# EAGLE board copro - Copy (EAGLE 8.4.1)
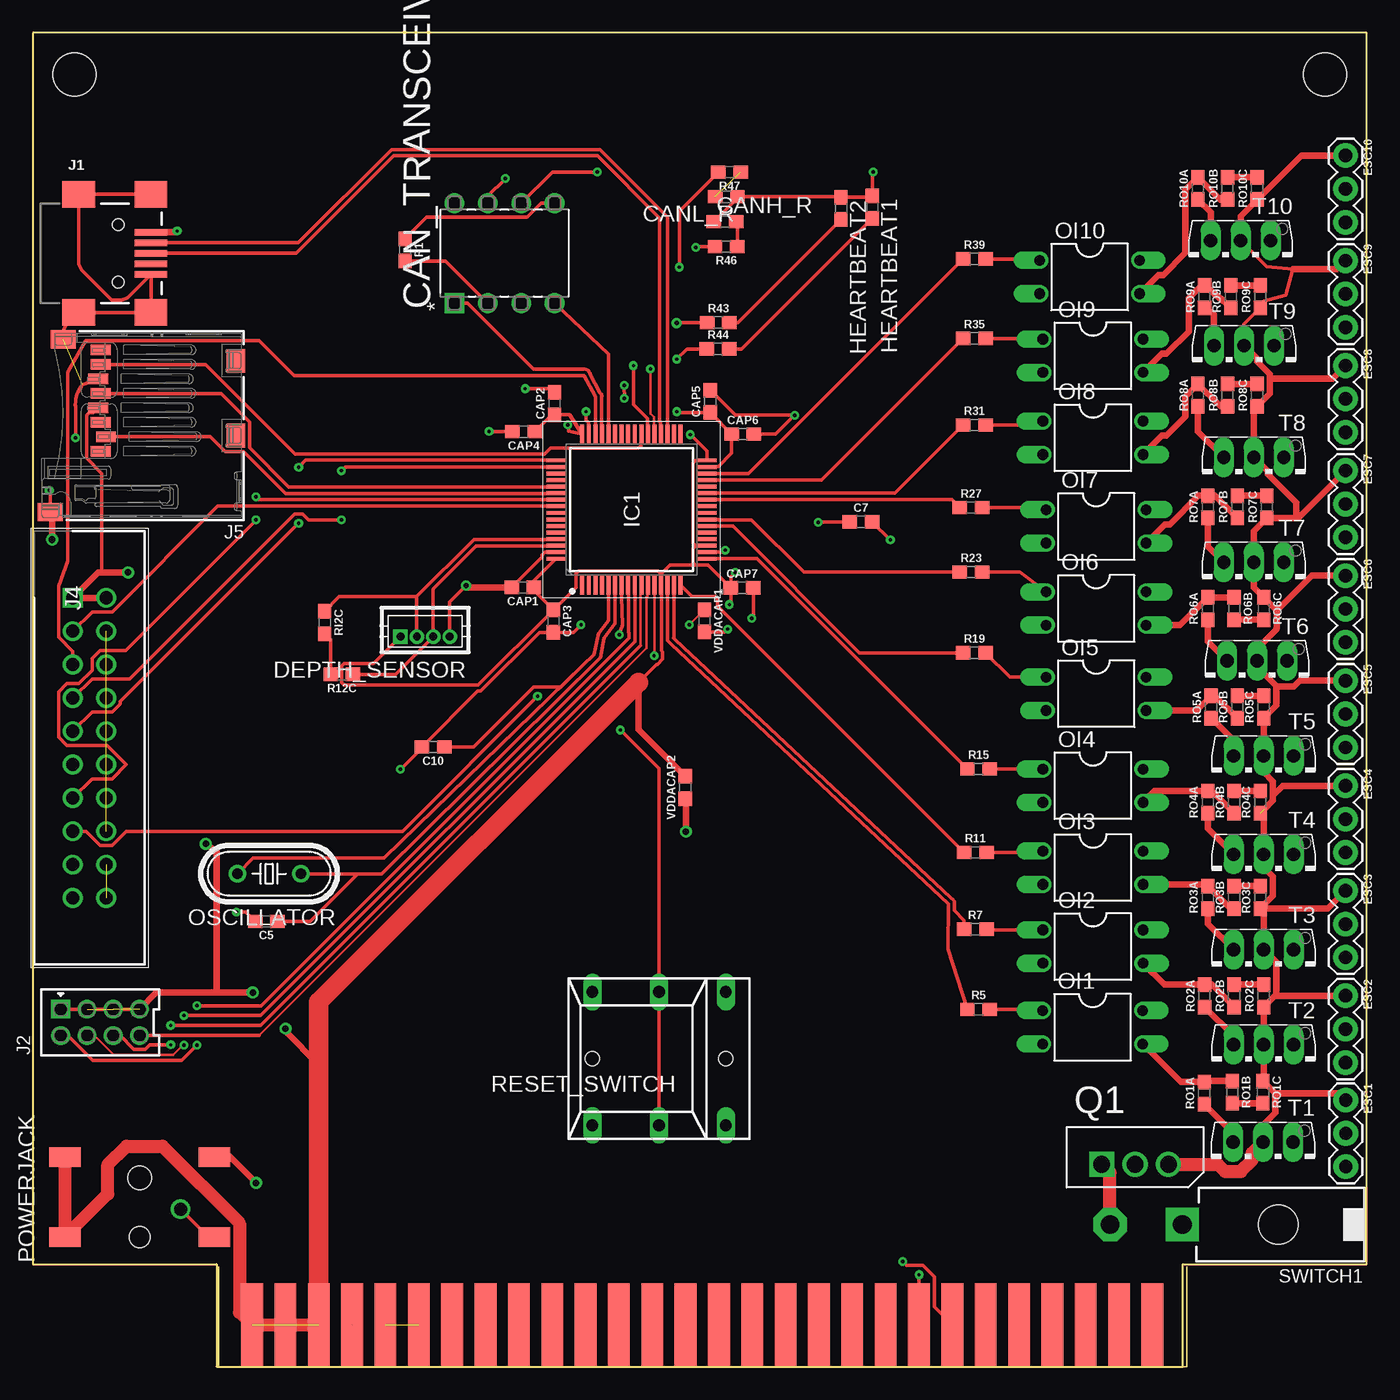
[diagram p0: board, top side]
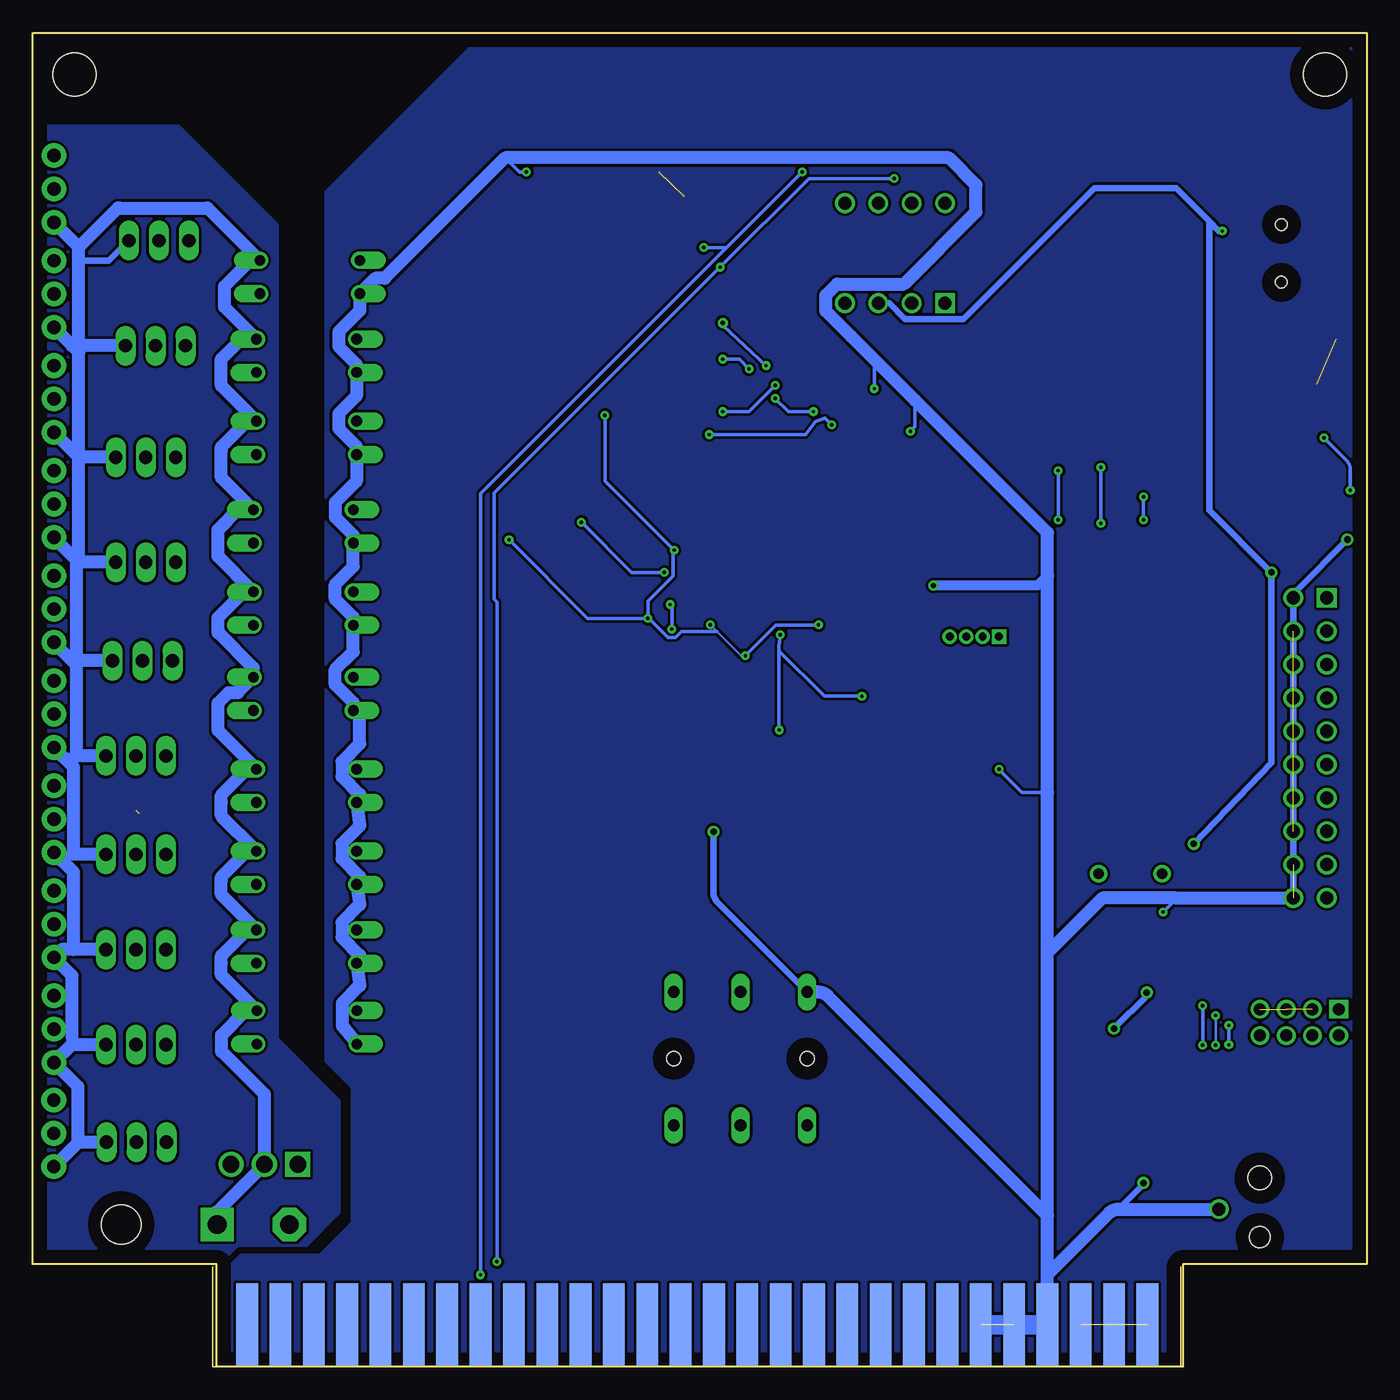
[diagram p1: board, bottom side, seen from below]

Size 101.6 x 101.6 mm. Coordinates in mm from the lower left corner, seen from the top.
Outline: 14,0 87.6,0 87.6,7.8 101.6,7.8 101.6,101.6 0,101.6 0,7.8 14,7.8 14,0
Copper layers (1*16): Top 0.035mm / dielectric 1.5mm / Bottom 0.035mm
Design rules "battery_balancer": minimum track width 6mil, minimum drill 0.35mm, track to track 0.205mm, track to pad 0.205mm, pad to pad 0.205mm, via to via 0.205mm, smd to smd 6mil, copper to edge 40mil, drill to drill 6mil, minimum pad ring 10mil, minimum via ring 8mil, stop-mask expansion 4mil, vias tented up to drill 0mil, thermal gap 10mil
Holes 3.26 mm at 3.17,98.42 98.42,98.42

## Footprints (pad centres in the part's own frame; a part is rotated, then mirrored left to right if it is on the bottom)
0603 = smd 1.1 x 1: 1 -0.85,0; 2 0.85,0
DIP254P762X432-8 = drill 0.991 square: 1 -7.62,7.62 | drill 0.991: 2 -7.62,5.08; 3 -7.62,2.54; 4 -7.62,0; 5 0,0; 6 0,2.54; 7 0,5.08; 8 0,7.62
DF13-4P-1.25DSA = drill 0.6 pad 1.016 square: P$1 1.875,0 | drill 0.6 pad 1.016: P$2 0.625,0; P$3 -0.625,0; P$4 -1.875,0
1X03 = drill 1.016 pad 1.88: 1 0,0; 2 2.54,0; 3 5.08,0
QFP50P1200X1200X160-64N = smd 1.45 x 0.3: 1 -5.75,3.75; 2 -5.75,3.25; 3 -5.75,2.75; 4 -5.75,2.25; 5 -5.75,1.75; 6 -5.75,1.25; 7 -5.75,0.75; 8 -5.75,0.25; 9 -5.75,-0.25; 10 -5.75,-0.75; 11 -5.75,-1.25; 12 -5.75,-1.75; 13 -5.75,-2.25; 14 -5.75,-2.75; 15 -5.75,-3.25; 16 -5.75,-3.75; 33 5.75,-3.75; 34 5.75,-3.25; 35 5.75,-2.75; 36 5.75,-2.25; 37 5.75,-1.75; 38 5.75,-1.25; 39 5.75,-0.75; 40 5.75,-0.25; 41 5.75,0.25; 42 5.75,0.75; 43 5.75,1.25; 44 5.75,1.75; 45 5.75,2.25; 46 5.75,2.75; 47 5.75,3.25; 48 5.75,3.75 | smd 0.3 x 1.45: 17 -3.75,-5.75; 18 -3.25,-5.75; 19 -2.75,-5.75; 20 -2.25,-5.75; 21 -1.75,-5.75; 22 -1.25,-5.75; 23 -0.75,-5.75; 24 -0.25,-5.75; 25 0.25,-5.75; 26 0.75,-5.75; 27 1.25,-5.75; 28 1.75,-5.75; 29 2.25,-5.75; 30 2.75,-5.75; 31 3.25,-5.75; 32 3.75,-5.75; 49 3.75,5.75; 50 3.25,5.75; 51 2.75,5.75; 52 2.25,5.75; 53 1.75,5.75; 54 1.25,5.75; 55 0.75,5.75; 56 0.25,5.75; 57 -0.25,5.75; 58 -0.75,5.75; 59 -1.25,5.75; 60 -1.75,5.75; 61 -2.25,5.75; 62 -2.75,5.75; 63 -3.25,5.75; 64 -3.75,5.75
USB-MINIB = smd 2.5 x 0.5: D+ 2.5,0; D- 2.5,0.8; GND 2.5,-1.6; ID 2.5,-0.8; VBUS 2.5,1.6 | smd 2.5 x 2: S1 -3,4.5; S2 2.5,4.5; S3 -3,-4.5; S4 2.5,-4.5 | hole 0.9: 0,2.2; 0,-2.2
79107-08 = drill 0.914 square: 1 -3,1 | drill 0.914: 2 -3,-1; 3 -1,1; 4 -1,-1; 5 1,1; 6 1,-1; 7 3,1; 8 3,-1
SHDR20W81P254_2X10_3300X840X93 = drill 1 pad 1.5 square: 1 0,0 | drill 1 pad 1.5: 2 0,2.54; 3 2.54,0; 4 2.54,2.54; 5 5.08,0; 6 5.08,2.54; 7 7.62,0; 8 7.62,2.54; 9 10.16,0; 10 10.16,2.54; 11 12.7,0; 12 12.7,2.54; 13 15.24,0; 14 15.24,2.54; 15 17.78,0; 16 17.78,2.54; 17 20.32,0; 18 20.32,2.54; 19 22.86,0; 20 22.86,2.54
5008730806 = smd 0.8 x 1.5: 1 -1.94,10.7; 2 -0.84,10.3; 3 0.26,10.7; 4 1.36,10.9; 5 2.46,10.7; 6 3.56,10.9; 7 4.66,10.7; 8 5.76,10.7 | smd 1.8 x 1.4: CD1 -0.75,0.4; CD2 4.95,0.4 | smd 1.4 x 1.9: S3 -6.575,14.55; S4 6.575,13.55
DIL04 = drill 0.813 offset: 1 -1.27,-3.81; 2 1.27,-3.81; 3 1.27,3.81; 4 -1.27,3.81
HC49/S = drill 0.813: 1 -2.413,0; 2 2.413,0
CUI_PJ-002AH-SMT-TR = smd 1.5 x 2.4: 1.1 -3.05,5.7; 1.2 3.05,5.7; 2 -3.05,-5.7; 3 3.05,-5.7 | hole 1.6: -3.05,0 | hole 1.8: 1.45,0
TO254P450X1020X1935-3P = drill 1.27 square: 1 -5.08,-1.092 | drill 1.27: 2 -2.54,-1.092; 3 0,-1.092
REKN = drill 0.9 long: 0A 5.08,5.08; 0B 5.08,-5.08; 1A 0,5.08; 1B 0,-5.08; A -5.08,5.08; B -5.08,-5.08 | hole 1.1: -5.08,0; 5.08,0
39-30-?02? = drill 1.422 pad 2.54 square: 1 0,0 | drill 1.422 pad 2.54 octagon: 2 0,5.512 | hole 3: 0,-7.3
TO126V = drill 1.016 long: 1 -2.286,-1.27; 2 0,-1.27; 3 2.286,-1.27
5530843-6-BOARDFINGERS = smd 1.651 x 6.35 bottom: 3.3V_4 0.826,3.175; 3.3V_5 3.365,3.175; 3.3V_6 5.905,3.175; EXTRA1 16.066,3.175; EXTRA2 18.605,3.175; EXTRA3 21.145,3.175; EXTRA4 23.686,3.175; EXTRA5 26.226,3.175; EXTRA6 28.765,3.175; EXTRA7 31.305,3.175; EXTRA8 33.846,3.175; EXTRA9 36.386,3.175; EXTRA10 38.925,3.175; EXTRA11 41.465,3.175; EXTRA12 44.005,3.175; EXTRA13 46.545,3.175; EXTRA14 49.086,3.175; EXTRA15 51.626,3.175; EXTRA16 54.166,3.175; EXTRA17 56.706,3.175; EXTRA18 59.245,3.175; EXTRA19 61.785,3.175; EXTRA20 64.326,3.175; EXTRA21 66.865,3.175; EXTRA22 69.406,3.175; GND_4 8.445,3.175; GND_5 10.986,3.175; GND_6 13.525,3.175 | smd 1.651 x 6.35: 3.3VP1 0.826,3.175; 3.3VP2 3.365,3.175; 3.3VP3 5.905,3.175; CAN_H 51.626,3.175; CAN_L 54.166,3.175; EXTRA23 16.066,3.175; EXTRA24 18.605,3.175; EXTRA25 21.145,3.175; EXTRA26 23.686,3.175; EXTRA27 26.226,3.175; EXTRA28 28.765,3.175; EXTRA29 31.305,3.175; EXTRA30 33.846,3.175; EXTRA31 36.386,3.175; EXTRA32 38.925,3.175; EXTRA33 41.465,3.175; EXTRA34 44.005,3.175; EXTRA35 46.545,3.175; GND1 8.445,3.175; GND2 10.986,3.175; GND3 13.525,3.175; KILL_SWITCH 49.086,3.175; SCL_DEPTH 59.245,3.175; SCL_ESC 69.406,3.175; SCL_SENSOR 64.326,3.175; SDA_DEPTH 56.706,3.175; SDA_ESC 66.865,3.175; SDA_SENSOR 61.785,3.175

## Placement (x,y rotation side)
C5  1nF  [0603]  17.79,33.92 180 top
C7  .1 uF  [0603]  63.08,64.35 0 top
C10  1nF  [0603]  30.49,47.2 180 top
CAN_TRANSCEIVER  MCP2551-I/P  [DIP254P762X432-8]  39.74,88.62 90 top
CANH_R  LTST-S270GKT  [0603]  52.73,87.21 0 top
CANL_R  LTST-S270GKT  [0603]  52.83,89.11 180 top
CAP1  100nF  [0603]  37.33,59.36 180 top
CAP2  100nF  [0603]  39.74,73.36 90 top
CAP3  100nF  [0603]  39.65,56.79 270 top
CAP4  100nF  [0603]  37.39,71.21 180 top
CAP5  2.2uF  [0603]  51.6,73.53 90 top
CAP6  2.2uF  [0603]  54.08,71.03 0 top
CAP7  4.7uF  [0603]  54.02,59.33 0 top
DEPTH_SENSOR  DF13-4P-1.25DSA  [DF13-4P-1.25DSA]  29.88,55.61 180 top
ESC1  [1X03]  100.01,20.31 270 top
ESC2  [1X03]  100,28.25 270 top
ESC3  [1X03]  100,36.25 270 top
ESC4  [1X03]  100,44.25 270 top
ESC5  [1X03]  100,52.25 270 top
ESC6  [1X03]  100,60.25 270 top
ESC7  [1X03]  100,68.25 270 top
ESC8  [1X03]  100,76.25 270 top
ESC9  [1X03]  100,84.25 270 top
ESC10  [1X03]  100,92.25 270 top
HEARTBEAT1  LTST-S270GKT  [0603]  63.94,88.33 270 top
HEARTBEAT2  LTST-S270GKT  [0603]  61.56,88.22 270 top
IC1  STM32F405RGT6  [QFP50P1200X1200X160-64N]  45.6,65.29 90 top
J1  USB_MINI-B_SMT  [USB-MINIB]  6.5,84.8 0 top
J2  79107-08  [79107-08]  5.12,26.23 0 top
J4  30320-6002HB  [SHDR20W81P254_2X10_3300X840X93]  3.05,58.56 270 top
J5  5008730806  [5008730806]  15.88,71.67 90 top
OI1  SFH610  [DIL04]  80.72,25.85 270 top
OI2  SFH610  [DIL04]  80.75,32 270 top
OI3  SFH610  [DIL04]  80.75,38 270 top
OI4  SFH610  [DIL04]  80.75,44.25 270 top
OI5  SFH610  [DIL04]  81,51.25 270 top
OI6  SFH610  [DIL04]  81,57.75 270 top
OI7  SFH610  [DIL04]  81,64 270 top
OI8  SFH610  [DIL04]  80.75,70.75 270 top
OI9  SFH610  [DIL04]  80.75,77 270 top
OI10  SFH610  [DIL04]  80.5,83 270 top
OSCILLATOR  [HC49/S]  18,37.55 180 top
POWERJACK  PJ-002AH-SMT-TR  [CUI_PJ-002AH-SMT-TR]  8.14,12.93 90 top
Q1  L78M05CV  [TO254P450X1020X1935-3P]  86.5,16.5 0 top
R1  330  [0603]  28.35,85.06 270 top
R5  220  [0603]  72.04,27.23 0 top
R7  220  [0603]  71.79,33.33 0 top
R11  220  [0603]  71.79,39.17 0 top
R12C  4.7k  [0603]  23.54,52.74 180 top
R15  220  [0603]  72.04,45.52 0 top
R19  220  [0603]  71.71,54.38 0 top
R23  220  [0603]  71.46,60.52 0 top
R27  220  [0603]  71.46,65.42 0 top
R31  220  [0603]  71.71,71.72 0 top
R35  220  [0603]  71.71,78.33 0 top
R39  220  [0603]  71.71,84.38 0 top
R43  330  [0603]  52.21,79.54 0 top
R44  330  [0603]  52.19,77.53 0 top
R46  330  [0603]  52.81,85.33 180 top
R47  330  [0603]  53.06,90.99 180 top
RESET_SWITCH  [REKN]  47.7,23.46 180 top
RI2C  4.7k  [0603]  22.24,56.69 270 top
RO1A  1k  [0603]  89.22,20.84 90 top
RO1B  10k  [0603]  91.36,20.91 270 top
RO1C  10k  [0603]  93.7,20.91 270 top
RO2A  1k  [0603]  89.25,28.25 90 top
RO2B  10k  [0603]  91.5,28.25 90 top
RO2C  10k  [0603]  93.75,28.25 90 top
RO3A  1k  [0603]  89.5,35.75 90 top
RO3B  10k  [0603]  91.5,35.75 90 top
RO3C  10k  [0603]  93.5,35.75 90 top
RO4A  1k  [0603]  89.5,43 90 top
RO4B  10k  [0603]  91.5,43 90 top
RO4C  10k  [0603]  93.5,43 90 top
RO5A  1k  [0603]  89.75,50.25 90 top
RO5B  10k  [0603]  91.75,50.25 90 top
RO5C  10k  [0603]  93.75,50.25 90 top
RO6A  1k  [0603]  89.5,57.75 90 top
RO6B  10k  [0603]  91.5,57.75 270 top
RO6C  10k  [0603]  93.75,57.75 270 top
RO7A  1k  [0603]  89.5,65.5 90 top
RO7B  10k  [0603]  91.75,65.5 90 top
RO7C  10k  [0603]  94,65.5 90 top
RO8A  1k  [0603]  88.75,74 90 top
RO8B  10k  [0603]  91,74 90 top
RO8C  10k  [0603]  93.25,74 90 top
RO9A  1k  [0603]  89.25,81.5 90 top
RO9B  10k  [0603]  91.25,81.5 90 top
RO9C  10k  [0603]  93.5,81.5 90 top
RO10A  1k  [0603]  88.75,89.75 90 top
RO10B  10k  [0603]  91,89.75 90 top
RO10C  10k  [0603]  93.25,89.75 90 top
SWITCH1  39-30-02?  [39-30-?02?]  87.56,10.82 90 top
T1  [TO126V]  93.7,15.82 180 top
T2  [TO126V]  93.75,23.25 180 top
T3  [TO126V]  93.75,30.5 180 top
T4  [TO126V]  93.75,37.75 180 top
T5  [TO126V]  93.75,45.25 180 top
T6  [TO126V]  93.25,52.5 180 top
T7  [TO126V]  93,60 180 top
T8  [TO126V]  93,68 180 top
T9  [TO126V]  92.25,76.5 180 top
T10  [TO126V]  92,84.5 180 top
U$1  5530843  [5530843-6-BOARDFINGERS]  15.88,0 0 top
VDDACAP1  100nF  [0603]  51.16,56.81 270 top
VDDACAP2  1uF  [0603]  49.7,44.12 90 top

## Library data of the parts
C5 C7 C10 CAP1-CAP7 VDDACAP1 VDDACAP2 = SparkFun-Capacitors; PROD_ID: CAP-08390
CAN_TRANSCEIVER = MCP2551-I_P; DESCRIPTION: MCP2551 Series 5.5 V 1 Mb/s Surface Mount High-Speed CAN Transceiver - PDIP-8; DIGI-KEY_PART_NUMBER: MCP2551-I/P-ND; DIGI-KEY_PURCHASE_URL: https://www.digikey.com/product-detail/en/microchip-technology/MCP2551-I-P/MCP2551-I-P-ND/509453?WT.z_cid=ref_snapeda; MF: Microchip; MP: MCP2551-I/P; PACKAGE: DIP-8 Microchip
CANH_R CANL_R HEARTBEAT1 HEARTBEAT2 = LTST-S270GKT; AVAILABILITY: Good; DESCRIPTION: Green 1.6 x 0.6 x 1.15 mm 130° Water Clear 12 mcd 2.1 V Molded SMT LED; MF: Lite-On; MP: LTST-S270GKT; PACKAGE: 0603 Lite-On; PRICE: 0.08 USD
DEPTH_SENSOR = con-hirose-df13
ESC1-ESC10 = SparkFun-Connectors; PROD_ID: XXX-00000
IC1 = STM32F405RGT6; ALLIED_NUMBER: 70391099; DESCRIPTION: MCU 32-Bit, ARM Cortex M4, 1MB Flash STMicroelectronics STM32F405RGT6, 32bit ARM Cortex M4F Microcontroller, 168MHz, 1024 kB Flash, 64-Pin LQFP; HEIGHT: 1.6mm; MANUFACTURER_NAME: STMicroelectronics; MANUFACTURER_PART_NUMBER: STM32F405RGT6; RS_PART_NUMBER: 7468217; SUPPLIER_NAME: RS
J1 = SparkFun-Connectors; PROD_ID: CONN-08193; SF_ID: PRT-00587
J2 = con-molex-milli-grid
J4 = 30320-6002HB; DESCRIPTION: Header 20 position 3M 303 Series, 2.54mm Pitch 20 Way 2 Row Shrouded Straight PCB Header, Through Hole, Solder Termination; HEIGHT: 9.3mm; MANUFACTURER_NAME: 3M; MANUFACTURER_PART_NUMBER: 30320-6002HB; RS_PART_NUMBER: 8273587; SUPPLIER_NAME: RS
J5 = 5008730806; AVAILABILITY: Good; DESCRIPTION: Connector: for cards; SD Micro; push-push; SMT; gold plated; PIN: 8; MF: Molex; MP: 500873-0806; PACKAGE: None; PRICE: 2.47 USD
OI1-OI10 = optocoupler; MF: VISHAY/TELEFUNKEN; MPN: SFH6106-4; OC_FARNELL: 1469568; OC_NEWARK: 58K2193
OSCILLATOR = crystal; OC_FARNELL: 1667008; OC_NEWARK: unknown
POWERJACK = PJ-002AH-SMT-TR; AVAILABILITY: Good; DESCRIPTION: 24 VDC 5 A Surface Mount Unshielded 2 Conductors 3 Contacts Male Power Jack; MF: CUI; MP: PJ-002AH-SMT-TR; PACKAGE: None; PRICE: 0.98 USD
Q1 = L78M05CV; AVAILABILITY: Good; DESCRIPTION: L78M05 Series 5 V 500 mA Three Terminal Positive Voltage Regulator - TO-220; MF: STMicroelectronics; MP: L78M05CV; PACKAGE: TO-220 STMicroelectronics; PRICE: 0.29 USD
R1 R5 R7 R11 R12C R15 R19 R23 R27 R31 R35 R39 R43 R44 R46 R47 RI2C RO1A RO1B RO1C RO2A RO2B RO2C RO3A RO3B RO3C RO4A RO4B RO4C RO5A RO5B RO5C RO6A RO6B RO6C RO7A RO7B RO7C RO8A RO8B RO8C RO9A RO9B RO9C RO10A RO10B RO10C = SparkFun-Resistors; PROD_ID: RES-07856
RESET_SWITCH = switch
SWITCH1 = con-molex-mini-fit
T1-T10 = transistor
U$1 = 5530843-6

## Nets
2: IC1.8 J2.2
3.3V: C7.1 CAN_TRANSCEIVER.3 CAP1.1 CAP2.1 CAP3.1 CAP4.1 CAP7.1 DEPTH_SENSOR.P$1 IC1.13 IC1.19 IC1.32 IC1.48 IC1.64 J1.VBUS J2.1 J2.3 J2.5 J2.7 J4.1 J4.2 J5.4 POWERJACK.1.1 POWERJACK.1.2 R12C.2 RI2C.2 U$1.3.3VP1 U$1.3.3VP2 U$1.3.3VP3 VDDACAP1.2 VDDACAP2.2
4: IC1.9 J2.4
5V: ESC1.1 ESC2.1 ESC3.1 ESC4.1 ESC5.1 ESC6.1 ESC7.1 ESC8.1 ESC9.1 ESC10.1 Q1.3 RO1C.1 RO2C.1 RO3C.1 RO4C.1 RO5C.1 RO6C.1 RO7C.1 RO8C.1 RO9C.1 RO10C.1 T1.2 T2.2 T3.2 T4.2 T5.2 T6.2 T7.2 T8.2 T9.2 T10.2
6: IC1.10 J2.6
8: IC1.11 J2.8
18_22V: Q1.1 SWITCH1.2
CANH: CAN_TRANSCEIVER.6 R46.2 U$1.CAN_H
CANL: CAN_TRANSCEIVER.7 R47.2 U$1.CAN_L
CLK: IC1.53 J5.5
CMD: IC1.54 J5.2
D+: IC1.36 J1.D+
D-: IC1.35 J1.D-
DATO: IC1.39 J5.7
GND: C5.2 C7.2 C10.2 CANH_R.1 CANL_R.1 CAP1.2 CAP2.2 CAP3.2 CAP4.2 CAP5.2 CAP6.2 CAP7.2 DEPTH_SENSOR.P$4 HEARTBEAT1.1 HEARTBEAT2.1 IC1.12 IC1.18 IC1.63 J1.GND J1.S1 J1.S2 J1.S3 J1.S4 J4.4 J4.6 J4.8 J4.10 J4.12 J4.14 J4.16 J4.18 J4.20 J5.6 J5.S3 J5.S4 OI1.2 OI2.2 OI3.2 OI4.2 OI5.2 OI6.2 OI7.2 OI8.2 OI9.2 OI10.2 POWERJACK.2 POWERJACK.3 RESET_SWITCH.0B U$1.GND1 U$1.GND2 U$1.GND3 U$1.GND_4 U$1.GND_5 U$1.GND_6 VDDACAP1.1 VDDACAP2.1
GNDBAT: ESC1.3 ESC2.3 ESC3.3 ESC4.3 ESC5.3 ESC6.3 ESC7.3 ESC8.3 ESC9.3 ESC10.3 OI1.4 OI2.4 OI3.4 OI4.4 OI5.4 OI6.4 OI7.4 OI8.4 OI9.4 OI10.4 Q1.2 SWITCH1.1 T1.1 T2.1 T3.1 T4.1 T5.1 T6.1 T7.1 T8.1 T9.1 T10.1
HEARTBEAT1: IC1.37 R44.1
HEARTBEAT2: IC1.38 R43.1
JTAG3: IC1.56 J4.3
JTAG5: IC1.46 J4.5
JTAG9: IC1.49 J4.9
JTAG13: IC1.55 J4.13
JTAG15: IC1.7 J4.15 RESET_SWITCH.1A RESET_SWITCH.1B
N$5: CAN_TRANSCEIVER.2 R1.2
N$8: CANL_R.2 R47.1
N$12: CAN_TRANSCEIVER.5 R1.1
N$14: HEARTBEAT2.2 R43.2
N$28: HEARTBEAT1.2 R44.2
N$34: CANH_R.2 R46.1
OI1: IC1.14 R5.1
OI2: IC1.15 R7.1
OI3: IC1.16 R11.1
OI4: IC1.17 R15.1
OI5: IC1.22 R19.1
OI6: IC1.23 R23.1
OI7: IC1.26 R27.1
OI8: IC1.27 R31.1
OI10: IC1.30 R39.1
OIO9: IC1.29 R35.1
OSC1: C5.1 IC1.6 OSCILLATOR.1
OSC2: C10.1 IC1.5 OSCILLATOR.2
P$2: DEPTH_SENSOR.P$2 IC1.61 RI2C.1
PA15: IC1.50 J4.7
POWER: U$1.3.3V_4 U$1.3.3V_5 U$1.3.3V_6
POWER1O1: RO1B.2 RO1C.2
POWER1O2: RO2B.2 RO2C.2
POWER1O3: RO3B.2 RO3C.2
POWER1O4: RO4B.2 RO4C.2
POWER1O5: RO5B.2 RO5C.2
POWER1O6: RO6B.2 RO6C.2
POWER1O7: RO7B.2 RO7C.2
POWER1O8: RO8B.2 RO8C.2
POWER1O9: RO9B.2 RO9C.2
POWER1O10: RO10B.2 RO10C.2
POWER2O1: OI1.3 RO1A.2 RO1B.1
POWER2O2: OI2.3 RO2A.2 RO2B.1
POWER2O3: OI3.3 RO3A.2 RO3B.1
POWER2O4: OI4.3 RO4A.2 RO4B.1
POWER2O5: OI5.3 RO5A.2 RO5B.1
POWER2O6: OI6.3 RO6A.2 RO6B.1
POWER2O9: OI9.3 RO9A.2 RO9B.1
POWER2O10: OI10.3 RO10A.2 RO10B.1
POWER207: OI7.3 RO7A.2 RO7B.1
POWER208: OI8.3 RO8A.2 RO8B.1
PS$3: DEPTH_SENSOR.P$3 IC1.62 R12C.1
PWM1: OI1.1 R5.2
PWM2: OI2.1 R7.2
PWM3: OI3.1 R11.2
PWM4: OI4.1 R15.2
PWM5: OI5.1 R19.2
PWM6: OI6.1 R23.2
PWM7: OI7.1 R27.2
PWM8: OI8.1 R31.2
PWM9: OI9.1 R35.2
PWM10: OI10.1 R39.2
RXD: CAN_TRANSCEIVER.4 IC1.44
T1: RO1A.1 T1.3
T2: RO2A.1 T2.3
T3: RO3A.1 T3.3
T4: RO4A.1 T4.3
T5: RO5A.1 T5.3
T6: RO6A.1 T6.3
T7: RO7A.1 T7.3
T8: RO8A.1 T8.3
T9: RO9A.1 T9.3
T10: RO10A.1 T10.3
TXD: CAN_TRANSCEIVER.1 IC1.45
VCAP_2TO1: CAP5.1 CAP6.1 IC1.31 IC1.47

## Tracks (layer width: path | path; a pad name or v marks a point on that pad's centre or on a via)
2  (via drill 0.25)
  Top 0.25: J2.2 2.65,25.23 4.55,23.32 11.32,23.32 12.21,24.21 v12.5,24.5 | v12.5,27.5 17.41,27.5 45.41,55.5 45.41,55.89 45.37,55.93 45.37,59.52 IC1.8
  Bottom 0.25: v12.5,24.5 v12.5,27.5
3.3V  (via drill 0.25, 0.5)  (3 unrouted)
  Top 0.25: J2.7 J2.1 | v40.75,71.75 40.81,71.25 IC1.48 40.88,72.51 CAP2.1 39.54,72.51 CAP4.1 | v50.08,71 51.35,69.73 IC1.32 51.33,69.02 50.49,69.02 50.3,68.82 50.3,62.75 50.49,62.56 51.33,62.56 IC1.19 51.33,62.52 50.49,62.52 50.3,62.32 50.3,61.25 50.49,61.06 | C7.1 59.85,64.35 v59.82,64.32 | v53.5,60.5 53.17,60.17 CAP7.1 | CAP7.1 51.44,61.06 50.49,61.06 | CAP7.1 53.17,58.17 v53.06,58.06 | v52.93,56.18 52.71,55.96 VDDACAP1.2 | CAP3.1 41.37,59.36 41.37,60.4 41.56,60.59 47.64,60.59 47.83,60.4 47.83,59.56 IC1.13 | CAP3.1 38.17,59.11 CAP1.1 38.17,59.86 IC1.64 | IC1.13 47.87,59.56 47.87,60.4 48.53,61.06 50.49,61.06 | R12C.2 | R12C.2 22.69,55.39 RI2C.2 | 5.25,60.5 5.25,68.04 4.09,69.2 4.09,72.47 4.29,72.67 4.61,72.67 J5.4 | 23.51,53.37 23.7,53.57 25.95,53.57 DEPTH_SENSOR.P$1 | 23.51,53.37 23.51,52.1 23.7,51.91 33.92,51.91 CAP3.1 | 23.51,53.37 22.88,52.75 R12C.2 | IC1.13 47.87,59.52 47.87,54.54 47.98,54.43 47.98,53.89 47.59,53.5 47.5,53.5 46.12,52.12
  Top 0.5: 21.78,23 19.25,25.53 v19.25,25.75 | v16.75,28.5 14,28.5 | 14,28.5 9.4,28.5 J2.7 | 14,28.5 14,39.25 v13.18,39.82 | v7.25,60.5 5.25,60.5 4.99,60.5 J4.1 J4.2 | v11,86.5 10.9,86.4 J1.VBUS | VDDACAP2.2 46.12,48.55 46.12,52.12
  Top 1: POWERJACK.1.2 POWERJACK.1.1 5.72,13.16 5.72,15.38 7.14,16.79 9.87,16.79 15.74,10.92 15.74,4.13 U$1.3.3VP1 U$1.3.3VP3
  Top 1.5: U$1.3.3VP3 21.78,23 21.78,27.78 46.12,52.12
  Bottom 0.25: v40.75,71.75 41.25,72.25 42,72 42.75,71 v50.08,71 | v59.82,64.32 56,60.5 v53.5,60.5 | v53.06,58.06 52.93,57.93 v52.93,56.18
  Bottom 0.5: v19.25,25.75 16.75,28.25 v16.75,28.5 | v13.18,39.82 7.25,46 v7.25,60.5 12,65.25 12,87.25 | 12,87.25 14.5,89.75 20.75,89.75 30.7,79.8 35.16,79.8 36.36,81 CAN_TRANSCEIVER.3 | 12,87.25 11.25,86.5 v11,86.5
4  (via drill 0.25)
  Top 0.2: J2.4 4.69,25.23 6.16,23.75 10.7,23.75 11.45,24.5 v11.5,24.5
  Top 0.25: v11.5,26.75 17.36,26.75 45.87,55.25 45.87,59.52 IC1.9
  Bottom 0.2: v11.5,24.5 v11.5,26.75
5V  (1 unrouted)
  Top 0.25: T9.2 92.25,79.4 RO9C.1 93.75,81.16 95.45,81.61 95.95,83.59 94,83.79 93,84.77 T10.2
  Top 0.5: 94.66,20.8 94.66,19.32 93.7,18.37 T1.2 | 94.66,20.8 RO1C.1 93.75,21.81 T2.2 RO2C.1 94.6,28.25 | 94.6,28.25 ESC2.1 | 94.66,20.8 99.52,20.8 ESC1.1 | 94.6,28.25 94.6,28.26 94.7,28.36 94.7,30.82 T3.2 93.75,34.65 RO3C.1 | RO3C.1 98.65,34.9 ESC3.1 | RO3C.1 94.45,35.85 94.45,37.34 93.75,38.04 T4.2 93.75,42.41 94.45,43.11 94.45,43.5 | 94.45,43.5 94.45,44.59 93.75,45.29 T5.2 RO5C.1 94.7,50.36 94.7,51.75 | 94.7,51.75 94.7,51.84 93.75,52.79 93.75,53.27 T6.2 93.25,54.71 94.7,56.16 94.7,56.2 94.75,56.25 94.75,57.6 | 94.75,57.6 RO6C.1 93,59.35 T7.2 93,63.65 RO7C.1 96.25,64.65 | 94.2,75.25 94.2,74.11 RO8C.1 93,72.9 T8.2 94.07,68.2 94.07,68 96.25,65.82 96.25,64.65 | 94.2,75.25 94.2,75.59 93.25,76.54 93.25,76.77 T9.2 | T10.2 92,87.65 RO10C.1 96.6,92.25 ESC10.1 | 95.95,83.59 99.34,83.59 ESC9.1 | 94.2,75.25 99,75.25 ESC8.1 | 94.75,57.6 97.4,60.25 ESC6.1 | ESC5.1 96.5,52.25 96.04,51.79 94.75,51.79 94.7,51.75 | 94.45,43.5 95.2,44.25 ESC4.1 | 96.25,64.65 96.4,64.65 ESC7.1
  Top 1: Q1.3 90.27,15.41 90.81,14.87 92.02,14.87 92.88,15.72 92.88,16.28 T1.2
6  (via drill 0.25)
  Top 0.2: 46.3,54.94 46.3,55.93 46.3,55.94 46.3,59.49 IC1.10
  Top 0.25: J2.6 6.65,25.23 7.69,24.18 8.56,24.18 8.89,24.52 v10.5,24.52 | v10.5,26 17.36,26 46.3,54.94
  Bottom 0.25: v10.5,24.52 v10.5,26
8
  Top 0.2: 17.23,25.23 46.75,54.75 46.75,58.63 46.8,58.69 46.8,59.49 IC1.11
  Top 0.25: IC1.11 46.83,59.52 | 17.23,25.23 J2.8
18_22V
  Top 1: SWITCH1.2 82.05,14.78 Q1.1
CANH  (via drill 0.25)
  Top 0.25: U$1.CAN_H v67.5,7 | v43,91 39.57,91 CAN_TRANSCEIVER.6 | R46.2 50.58,85.33 v50.5,85.25
  Bottom 0.25: v67.5,7 67.5,66.5 48.75,85.25 | v43,91 47.25,86.75 48.75,85.25 | v50.5,85.25 48.75,85.25
CANL  (via drill 0.25)
  Top 0.25: U$1.CAN_L 68.66,4.56 68.66,6.85 67.79,7.71 66.54,7.71 v66.25,8 | v49.25,83.75 49.25,88.02 R47.2 | v36,90.5 34.66,89.16 CAN_TRANSCEIVER.7
  Bottom 0.25: v66.25,8 66.25,58.25 66.46,58.46 66.46,66.54 v49.25,83.75 42.5,90.5 v36,90.5
CLK
  Top 0.25: J5.5 14.33,74.14 16.5,71.96 16.5,70 19.5,67 38.97,67 38.99,67.02 39.83,67.02 IC1.53
CMD
  Top 0.25: J5.2 13.5,70.83 14.64,69.69 16.05,69.69 19.25,66.5 38.97,66.5 38.99,66.52 39.83,66.52 IC1.54
D+
  Top 0.25: J1.D+ 20.05,84.8 27.5,92.25 43,92.25 47.75,87.5 47.75,71.98 47.83,71.9 47.83,71.06 IC1.36
D-
  Top 0.25: J1.D- 20.21,85.6 27.31,92.7 43.19,92.7 48.33,87.56 48.33,71.06 IC1.35
DATO
  Top 0.25: J5.7 13.16,76.33 20,69.5 38.97,69.5 39.45,69.98 46.14,69.98 46.33,70.18 46.33,71.02 IC1.39
GND  (via drill 0.25, 0.35, 0.5, 1 pad 1.5)  (12 unrouted)
  Top 0.2: VDDACAP1.1 v50,56.5 | v47.32,54.16 47.35,54.19 IC1.12
  Top 0.25: C5.2 16.23,34.63 v15.5,34.63 | v37.5,74.5 39.45,74.5 CAP2.2 | v34.75,71.25 34.79,71.21 CAP4.2 | CAP1.2 38.8,61.68 38.8,61.82 39.01,62.04 IC1.63 | v33,59.5 31.75,58.25 DEPTH_SENSOR.P$4 | v28,45.5 29.64,47.14 C10.2 33.89,51.45 34.11,51.45 38.59,55.94 CAP3.2 41.19,55.94 v41.75,56.5 | J5.S3 1.32,66.57 arc45 v1.25,66.75 | v3.25,70.75 3.25,73.1 arc-45 3.79,74.8 J5.6 | J5.S4 2.33,78.71 arc-45 2.62,79.42 J1.S3 J1.S4 J1.GND 7.34,81.54 arc-45 6.64,81.25 6,81.25 3.79,83.46 arc-45 3.5,84.16 J1.S1 J1.S2 | v11.25,12 13.08,10.17 arc45 13.79,9.88 POWERJACK.2 | v54.75,57 54.88,57.12 CAP7.2 | v52.75,62.2 52.59,62.04 IC1.18 | CAP6.2 56.58,71.03 v58.03,72.47 53.5,72.47 CAP5.2 | v65.33,62.98 65.29,62.98 C7.2 | v64,91 63.94,90.94 HEARTBEAT1.1 63.84,89.08 HEARTBEAT2.1 61.52,89.11 53.77,89.11 | 53.77,89.11 CANL_R.1 | CANH_R.1 53.77,89.11 | 15.03,15.97 POWERJACK.3
  Top 0.5: v33,59.5 33.14,59.36 CAP1.2 | v49.75,40.75 49.75,43.15 arc45 VDDACAP2.1 | v1.47,63 1.47,64.75 arc45 J5.S3 | v17,14 15.03,15.97
  Bottom 0.2: v50,56.5 49.5,56 47.66,54.16 v47.32,54.16
  Bottom 0.203: 24.26,3.45 23.91,5.08 | 24.26,3.45 U$1.GND1 | 24,3.71 24.26,3.45
  Bottom 0.25: v15.5,34.63 14.5,35.63 14.5,35.7 | 39.27,78.48 37.5,76.71 v37.5,74.5 | 34.4,73.61 34.4,71.61 v34.75,71.25 | 24.32,43.75 26.25,43.75 v28,45.5 | v1.25,66.75 1.25,68.34 arc-45 1.54,69.04 v3.25,70.75 | v47.32,54.16 44.98,56.5 v41.75,56.5 | v54.75,57 54.68,57 53.2,55.52 52.66,55.52 52.18,56 49.5,56 | v54.75,57 54.75,58.32 52.84,60.23 52.84,62.1 v52.75,62.2 58.03,67.47 v58.03,72.47 | v54.75,57 59.34,57 v65.33,62.98 | 65.62,92.08 64.54,91 v64,91 | 17,13.91 v17,14
  Bottom 0.5: RESET_SWITCH.0B 49.46,35.38 arc45 49.75,36.09 v49.75,40.75 | J4.20 J4.4 5.59,58.47 arc45 5.3,59.17 v1.47,63 | 18.91,12 17,13.91
  Bottom 0.75: 24.32,60.25 25.07,59.5 v33,59.5
  Bottom 1: U$1.GND1 24.32,7 | 24.32,7 24.32,11.5 | 24.32,11.5 24.32,31.5 | 24.32,31.5 24.32,43.75 24.32,60.25 24.32,63.53 34.4,73.61 39.27,78.48 41.19,80.4 41.19,81.61 40.34,82.46 35.26,82.46 29.75,87.97 29.75,90 31.83,92.08 65.62,92.08 74.8,82.91 75.52,82.91 OI10.2 76.69,80.45 78.31,78.84 78.31,77.7 76.94,76.34 OI9.2 76.94,73.95 78.31,72.59 78.31,71.45 76.94,70.09 OI8.2 76.94,67.45 78.56,65.84 78.56,64.7 77.19,63.34 OI7.2 77.19,60.95 78.56,59.59 78.56,58.45 77.19,57.09 OI6.2 77.19,54.45 78.56,53.09 78.56,51.95 77.19,50.59 OI5.2 76.69,49.48 76.69,47.45 78.06,46.09 78.06,44.95 76.69,43.59 OI4.2 76.69,41.2 78.06,39.84 78.06,38.7 76.69,37.34 OI3.2 76.69,35.2 78.06,33.84 78.06,32.7 76.69,31.34 OI2.2 76.69,29.03 78.03,27.69 78.03,25.95 OI1.2 | 24.32,31.5 20.12,35.7 14.5,35.7 J4.20 | 24.32,11.5 41.07,28.25 arc-45 41.78,28.54 RESET_SWITCH.0B | 24.32,7 19.61,11.71 arc45 18.91,12 v11.25,12
  Bottom 1.5: U$1.GND1 U$1.GND3
GNDBAT
  Bottom 0.5: ESC10.3 98.6,85.77 | ESC9.3 98.6,77.77 | ESC7.3 98.1,61.27 | 98.25,53.77 98.6,53.77 ESC6.3 | 98.25,46.52 99.35,46.52 ESC5.3 | 98.5,39.02 99.85,39.02 ESC4.3 | 98.65,24.52 98.65,25.09 98.61,25.13 | 98.1,84.25 95.81,84.25 T10.1 | 95.12,88.25 95,88.25
  Bottom 1: SWITCH1.1 87.56,11.8 Q1.2 83.96,20.75 87.22,24.01 87.22,25.22 87.25,25.25 85.38,27.12 OI1.4 87.25,29.84 87.25,30.75 87.25,31.3 85.27,33.27 OI2.4 87.25,35.96 87.25,37 87.25,37.3 85.27,39.27 OI3.4 87.25,41.96 87.25,43 87.25,43.55 85.27,45.52 OI4.4 87.5,48.46 87.5,50.54 86.7,51.34 85.98,51.34 OI5.4 84.81,53.23 87.5,55.91 87.5,56.75 87.5,57.05 85.52,59.02 OI6.4 87.5,61.71 87.5,63.75 85.98,65.27 OI7.4 87.25,67.71 87.25,69.75 87.25,70.05 85.27,72.02 OI8.4 87.25,74.71 87.25,76.75 85.73,78.27 OI9.4 87,80.71 87,82.25 87,82.3 85.02,84.27 OI10.4 88.29,88.25 95,88.25 | T9.1 98.6,77.77 | T8.1 98.1,69.27 | T7.1 98.1,61.27 98.1,69.27 | T6.1 98.25,53.77 98.25,61.42 ESC7.3 | T5.1 98.25,46.52 98.25,53.42 ESC6.3 | T4.1 98.5,39.02 98.5,45.67 ESC5.3 | T3.1 98.5,31.77 | 98.5,31.77 99.4,31.77 ESC3.3 98.61,29.77 98.61,25.13 | T2.1 98.65,24.52 ESC2.3 98.15,21.32 98.15,17.09 | T1.1 98.15,17.09 | 98.15,17.09 ESC1.3 | 98.5,31.77 98.5,37.67 ESC4.3 | 98.1,69.27 ESC8.3 | 98.1,69.27 98.1,77.27 | 98.1,77.27 ESC9.3 | 98.1,77.27 98.1,84.25 98.1,85.27 | 98.1,85.27 ESC10.3 | 98.1,85.27 95.12,88.25
HEARTBEAT1  (via drill 0.25)
  Top 0.2: v47.04,76 47.04,72.61 47.3,72.35 47.3,71.08 IC1.37
  Top 0.25: R44.1 49.81,77.53 v49.04,76.75
  Bottom 0.25: v49.04,76.75 47.79,76.75 v47.04,76
HEARTBEAT2  (via drill 0.25, 0.35)
  Top 0.25: R43.1 49.08,79.54 v49.04,79.5 | IC1.38 46.83,71.06 46.83,72.21 45.75,73.29 v45.75,76.25
  Bottom 0.25: v49.04,79.5 49.04,79.29 v45.75,76.25
JTAG3
  Top 0.25: J4.3 4.51,57.48 6.04,57.48 14.1,65.54 IC1.56
JTAG5
  Top 0.25: IC1.46 42.85,73.9 42,75.5 19.92,75.5 17.25,78.17 4.04,78.17 2.65,75.77 2.65,61.38 1.97,59.45 1.97,55.57 3.05,54.49 J4.5
JTAG9  (via drill 0.25)
  Top 0.25: J4.9 4.51,49.86 6.04,49.86 6.67,50.49 6.67,50.67 v20.25,64.25 | v20.25,68.5 20.79,69.04 IC1.49
  Bottom 0.25: v20.25,64.25 v20.25,68.5
JTAG13  (via drill 0.25)
  Top 0.25: J4.13 4.51,44.78 6.04,44.78 7.13,45.87 5.68,47.32 2.6,47.32 1.97,47.95 1.97,51.39 2.6,52.03 3.49,52.03 4.51,53.04 4.51,53.93 5.14,54.57 7.07,54.57 v17,64.5 | v17,66.25 17.21,66.04 IC1.55
  Bottom 0.25: v17,64.5 v17,66.25
JTAG15  (via drill 0.25)
  Top 0.25: v44.75,48.5 47.7,45.55 47.7,28.75 RESET_SWITCH.1B RESET_SWITCH.1A | v44.66,55.75 44.91,56.51 44.83,58.68 44.83,59.52 IC1.7 | v38.45,51.07 28.16,40.78 7.12,40.78 6.04,39.7 5.14,39.7 4.06,40.78 J4.15
  Bottom 0.25: 44.75,54.5 v44.75,48.5 | 44.75,54.5 44.75,54.91 v44.66,55.75 | v38.45,51.07 41.32,51.07 44.75,54.5
N$1
  pour Bottom: 101.5,7.75 87.5,7.75 86,9.25 80.75,9.25 78.25,11.75 78.25,20.25 83,25 83,87 90.5,94.5 101.5,94.5
N$2
  pour Bottom: 87.5,6.75 85.75,8.5 79.75,8.5 77.25,11 77.25,21.25 79.25,23.25 79.25,87.25 79.25,89.5 67.25,101.5 0,101.5 0,7.75 14,7.75 14,0 87.75,0 87.75,6.5 87.5,6.75
N$5
  Top 0.25: CAN_TRANSCEIVER.2 31.45,84.21 R1.2
N$8  (1 unrouted)
N$12
  Top 0.25: R1.1 29.98,87.55 37.65,87.55 38.72,88.62 CAN_TRANSCEIVER.5
N$14
  Top 0.25: R43.2 53.73,79.54 HEARTBEAT2.2
N$28
  Top 0.25: R44.2 53.99,77.53 HEARTBEAT1.2
N$34
  Top 0.25: R46.1 53.66,87.12 CANH_R.2
OI1
  Top 0.2: 48.4,58.69 48.4,59.49 IC1.14
  Top 0.25: R5.1 69.69,31.81 69.75,35.25 48.6,55.06 48.35,55.31 IC1.14
OI2
  Top 0.25: 48.87,59.52 IC1.15 48.85,55.55 48.8,55.5 48.92,55.39 69.93,35.7 69.95,35.7 70.07,35.57 70.2,35.45 70.2,35.44 70.21,35.43 70.2,35.25 70.21,35.08 70.2,35.07 70.2,34.75 70.94,34.01 R7.1
OI3
  Top 0.25: IC1.16 50.22,58.67 51.97,58.67 52.17,58.47 52.17,57.95 R11.1
OI4
  Top 0.25: IC1.17 55.17,61.54 R15.1
OI5
  Top 0.25: IC1.22 51.37,64.02 53.34,64.02 62.98,54.38 R19.1
OI6
  Top 0.25: IC1.23 51.37,64.52 52.21,64.52 52.23,64.5 54.75,64.5 58.73,60.52 R23.1
OI7
  Top 0.25: IC1.26 70,66.04 R27.1
OI8
  Top 0.25: IC1.27 65.67,66.54 R31.1
OI10
  Top 0.25: IC1.30 54.52,68.04 R39.1
OIO9
  Top 0.25: IC1.29 60.08,67.54 R35.1
OSC1
  Top 0.25: 24.75,37.55 OSCILLATOR.1 | 24.75,37.55 26.55,37.55 43.25,54 43.5,55.5 44.35,56.6 IC1.6 | C5.1 21.12,33.92 24.75,37.55
OSC2
  Top 0.25: OSCILLATOR.2 16.79,38.75 26.75,38.75 41.86,53.39 | 41.86,53.39 42.75,54.25 43.1,55.85 43.85,56.85 IC1.5 | C10.1 33.58,47.2 38.16,51.78 40.25,51.78 41.86,53.39
P$2
  Top 0.25: DEPTH_SENSOR.P$2 29.25,58.64 | IC1.61 39.83,63.02 33.62,63.02 29.25,58.64 | 29.25,58.64 23.34,58.64 RI2C.1
PA15  (via drill 0.25)
  Top 0.25: J4.7 4.51,52.4 7.4,52.4 19.96,64.96 20.54,64.96 21,64.5 v23.5,64.5 | v23.5,68.25 23.79,68.54 IC1.50
  Bottom 0.25: v23.5,64.5 v23.5,68.25
POWER  (2 unrouted)
POWER1O1
  Top 0.5: RO1B.2 RO1C.2
POWER1O2
  Top 0.5: RO2B.2 RO2C.2
POWER1O3
  Top 0.5: RO3B.2 RO3C.2
POWER1O4
  Top 0.5: RO4B.2 RO4C.2
POWER1O5
  Top 0.5: RO5B.2 RO5C.2
POWER1O6
  Top 0.5: RO6C.2 RO6B.2
POWER1O7
  Top 0.5: RO7C.2 RO7B.2
POWER1O8
  Top 0.5: RO8C.2 RO8B.2
POWER1O9
  Top 0.5: RO9B.2 RO9C.2
POWER1O10
  Top 0.5: RO10C.2 RO10B.2
POWER2O1
  Top 0.5: OI1.3 87.43,21.69 RO1A.2 89.3,21.76 RO1B.1
POWER2O2
  Top 0.5: OI2.3 86.19,29.1 RO2A.2 89.8,29.1 RO2B.1
POWER2O3
  Top 0.5: OI3.3 89.37,36.73 RO3A.2 91.2,34.9 RO3B.1
POWER2O4
  Top 0.5: RO4B.1 89.8,43.85 RO4A.2 85.43,43.85 OI4.3
POWER2O5
  Top 0.5: OI5.3 88.63,49.98 RO5A.2 90.05,51.1 RO5B.1
POWER2O6
  Top 0.5: RO6B.1 RO6A.2 87.38,56.48 OI6.3
POWER2O9
  Top 0.5: RO9B.1 90.7,81.15 RO9A.2 89,82.34 88.05,81.39 88.05,78.86 86.34,77.16 85.98,77.16 OI9.3
POWER2O10
  Top 0.5: RO10B.1 90.45,88.9 RO10A.2 87.8,89.64 87.8,84.86 86.09,83.16 85.73,83.16 OI10.3
POWER207
  Top 0.5: RO7B.1 90.05,66.35 RO7A.2 88.79,66.35 86.59,64.16 86.23,64.16 OI7.3
POWER208
  Top 0.5: RO8B.1 90.45,73.15 RO8A.2 87.8,73.89 87.8,72.36 86.34,70.91 85.98,70.91 OI8.3
PS$3
  Top 0.25: IC1.62 39.83,62.52 38.99,62.52 38.97,62.5 33.75,62.5 30.5,59.25 DEPTH_SENSOR.P$3 30.13,55.25 | 30.13,55.25 | R12C.1 27.62,52.74 30.13,55.25
PWM1
  Top 0.25: R5.2 76.56,27.23 OI1.1
PWM2
  Top 0.25: R7.2 72.69,33.27 OI2.1
PWM3
  Top 0.25: R11.2 76.59,39.17 OI3.1
PWM4
  Top 0.25: R15.2 76.69,45.52 OI4.1
PWM5
  Top 0.25: R19.2 74.42,52.52 OI5.1
PWM6
  Top 0.25: R23.2 75.19,60.52 OI6.1
PWM7
  Top 0.25: R27.2 77.03,65.42 OI7.1
PWM8
  Top 0.25: R31.2 76.64,71.72 OI8.1
PWM9
  Top 0.25: R35.2 76.89,78.33 OI9.1
PWM10
  Top 0.25: R39.2 76.58,84.38 OI10.1
RXD
  Top 0.25: CAN_TRANSCEIVER.4 43.85,77.14 IC1.44
T1
  Top 0.5: RO1A.1 91.41,17.8 T1.3
T2
  Top 0.5: RO2A.1 91.46,25.19 T2.3
T3
  Top 0.5: T3.3 89.5,33.73 RO3A.1
T4
  Top 0.5: RO4A.1 89.5,40.98 T4.3
T5
  Top 0.5: T5.3 91.46,47.69 RO5A.1
T6
  Top 0.5: T6.3 89.5,55.23 RO6A.1
T7
  Top 0.5: T7.3 89.5,62.48 RO7A.1
T8
  Top 0.5: RO8A.1 88.75,71.23 T8.3
T9
  Top 0.5: T9.3 89.96,80.19 RO9A.1
T10
  Top 0.5: RO10A.1 89.71,87.94 T10.3
TXD
  Top 0.25: IC1.45 43.33,71.06 43.33,73.91 43.34,73.95 43.3,74.01 43.3,74.09 43.22,74.17 42.45,75.61 42.45,75.69 42.37,75.77 42.31,75.88 42.24,75.9 42.19,75.95 42.07,75.99 38.15,75.99 33.13,81 CAN_TRANSCEIVER.1
VCAP_2TO1  (via drill 0.25)
  Top 0.25: v49.04,72.75 49.11,72.67 CAP5.1 53.23,71.05 CAP6.1 53.23,69.57 52.21,68.56 51.37,68.56 IC1.31 | v45.04,74.75 v45.06,73.75 | v42.14,72.75 42.14,72.09 42.33,71.9 42.33,71.06 IC1.47
  Bottom 0.25: v45.06,73.75 44.06,72.75 v42.14,72.75 | v45.04,74.75 47.04,72.75 v49.04,72.75